# EAGLE board me433-2021 (EAGLE 9.6.2)

Size 100 x 80 mm. Coordinates in mm from the lower left corner, seen from the top.
Outline: 0,0 100,0 100,80 0,80 0,0
Copper layers (1*16): Top 0.035mm / dielectric 1.5mm / Bottom 0.035mm
Design rules "default": minimum track width 6mil, minimum drill 0.35mm, track to track 6mil, track to pad 6mil, pad to pad 6mil, via to via 6mil, smd to smd 6mil, copper to edge 40mil, drill to drill 6mil, minimum pad ring 10mil, minimum via ring 8mil, stop-mask expansion 4mil, vias tented up to drill 0mil, thermal gap 10mil

## Footprints (pad centres in the part's own frame; a part is rotated, then mirrored left to right if it is on the bottom)
1X02 = drill 1.016 pad 1.88: 1 0,0; 2 2.54,0
C025-030X050 = drill 0.813 octagon: 1 -1.27,0; 2 1.27,0
B45181B = drill 0.813: + -2.54,0 | drill 0.813 octagon: - 2.54,0
1X01 = drill 1.016 pad 1.88: 1 0,0
LED3MM = drill 0.813 octagon: A -1.27,0; K 1.27,0
0207/10 = drill 0.813 octagon: 1 -5.08,0; 2 5.08,0
PUSH = drill 1: P$1 -2.5,0; P$2 2.5,0
DIL28-3 = drill 0.813 long: 1 -16.51,-3.81; 2 -13.97,-3.81; 3 -11.43,-3.81; 4 -8.89,-3.81; 5 -6.35,-3.81; 6 -3.81,-3.81; 7 -1.27,-3.81; 8 1.27,-3.81; 9 3.81,-3.81; 10 6.35,-3.81; 11 8.89,-3.81; 12 11.43,-3.81; 13 13.97,-3.81; 14 16.51,-3.81; 15 16.51,3.81; 16 13.97,3.81; 17 11.43,3.81; 18 8.89,3.81; 19 6.35,3.81; 20 3.81,3.81; 21 1.27,3.81; 22 -1.27,3.81; 23 -3.81,3.81; 24 -6.35,3.81; 25 -8.89,3.81; 26 -11.43,3.81; 27 -13.97,3.81; 28 -16.51,3.81
MICROUSB = smd 0.4 x 1.35: 1.VBUS -1.3,2.7; 2 -0.65,2.7; 3 0,2.7; 4 0.65,2.7; 5.GND 1.3,2.7 | drill 1.25 pad 1.778: P$6 -2.5,2.7 | drill 1.25 pad 1.676: P$7 2.5,2.7 | drill 1.5: P$8 -3.5,0; P$9 3.5,0
POLOLU3V3 = drill 1.016 pad 1.88: 1 0,3.81; 2 0,1.27; 3 0,-1.27; 4 0,-3.81
SLIDE = drill 0.9: 1 -2.5,0; 2 0,0; 3 2.5,0
1X05 = drill 1.016 pad 1.88: 1 0,0; 2 2.54,0; 3 5.08,0; 4 7.62,0; 5 10.16,0
POLOLU_DRV8835_H_BRIDGE_BREAKOUT = drill 0.6 square: P$1 -3.81,7.62; P$2 -3.81,5.08; P$3 -3.81,2.54; P$4 -3.81,0; P$5 -3.81,-2.54; P$6 -3.81,-5.08; P$7 -3.81,-7.62; P$8 3.81,-7.62; P$9 3.81,-5.08; P$10 3.81,-2.54; P$11 3.81,0; P$12 3.81,2.54; P$13 3.81,5.08; P$14 3.81,7.62
1X06 = drill 1.016 pad 1.88: 1 0,0; 2 2.54,0; 3 5.08,0; 4 7.62,0; 5 10.16,0; 6 12.7,0
1X07 = drill 1.016 pad 1.88: 1 0,0; 2 2.54,0; 3 5.08,0; 4 7.62,0; 5 10.16,0; 6 12.7,0; 7 15.24,0
2X12 = drill 1.016 pad 1.88 octagon: 1 0,0; 2 0,2.54; 3 2.54,0; 4 2.54,2.54; 5 5.08,0; 6 5.08,2.54; 7 7.62,0; 8 7.62,2.54; 9 10.16,0; 10 10.16,2.54; 11 12.7,0; 12 12.7,2.54; 13 15.24,0; 14 15.24,2.54; 15 17.78,0; 16 17.78,2.54; 17 20.32,0; 18 20.32,2.54; 19 22.86,0; 20 22.86,2.54; 21 25.4,0; 22 25.4,2.54; 23 27.94,0; 24 27.94,2.54

## Placement (x,y rotation side)
BAT  [1X02]  2.54,-10.16 0 top  (outside the outline)
C1  0.1uF  [C025-030X050]  3.81,-64.77 0 top  (outside the outline)
C2  0.1uF  [C025-030X050]  3.81,-71.12 0 top  (outside the outline)
C3  10uF  [B45181B]  3.81,-77.47 0 top  (outside the outline)
C4  0.1uF  [C025-030X050]  3.81,-106.68 0 top  (outside the outline)
HREF  [1X01]  -25.4,-167.64 0 top  (outside the outline)
J1  B  [1X02]  -10.16,-146.05 0 top  (outside the outline)
J2  A  [1X02]  -10.16,-149.86 0 top  (outside the outline)
J3  [1X01]  -30.48,-167.64 0 top  (outside the outline)
J4  [1X01]  -35.56,-167.64 0 top  (outside the outline)
J5  [1X01]  -40.64,-167.64 0 top  (outside the outline)
J6  [1X01]  -45.72,-167.64 0 top  (outside the outline)
J7  [1X01]  -50.8,-167.64 0 top  (outside the outline)
J8  [1X01]  -55.88,-167.64 0 top  (outside the outline)
J9  [1X01]  -60.96,-167.64 0 top  (outside the outline)
J10  [1X01]  -66.04,-167.64 0 top  (outside the outline)
J11  [1X01]  -71.12,-167.64 0 top  (outside the outline)
J12  [1X01]  -76.2,-167.64 0 top  (outside the outline)
LED1  RED  [LED3MM]  2.54,-35.56 0 top  (outside the outline)
LED2  GREEN  [LED3MM]  2.54,-123.19 0 top  (outside the outline)
PWDN  [1X01]  -20.32,-167.64 0 top  (outside the outline)
R1  330  [0207/10]  6.35,-41.91 0 top  (outside the outline)
R2  10k  [0207/10]  6.35,-59.69 0 top  (outside the outline)
R3  10k  [0207/10]  6.35,-114.3 0 top  (outside the outline)
R4  10k  [0207/10]  6.35,-119.38 0 top  (outside the outline)
R5  330  [0207/10]  6.35,-129.54 0 top  (outside the outline)
R6  10k  [0207/10]  6.35,-134.62 0 top  (outside the outline)
R7  4.7k  [0207/10]  -5.08,-163.83 0 top  (outside the outline)
R8  4.7k  [0207/10]  -5.08,-168.91 0 top  (outside the outline)
RESET  PUSH  [PUSH]  3.81,-52.07 0 top  (outside the outline)
STR  [1X01]  -15.24,-167.64 0 top  (outside the outline)
U1  PIC32MX170F256B  [DIL28-3]  33.02,40.64 270 top
U$1  MICROUSBMICROUSB  [MICROUSB]  6.35,-5.08 0 top
U$2  POLOLU3V3  [POLOLU3V3]  12.7,-17.78 0 top  (outside the outline)
U$3  SLIDE  [SLIDE]  6.35,-27.94 0 top  (outside the outline)
U$4  SNAP  [1X05]  2.54,-45.72 0 top  (outside the outline)
U$5  POLOLUDRV8835_GOOD  [POLOLU_DRV8835_H_BRIDGE_BREAKOUT]  -6.35,-133.35 0 top  (outside the outline)
U$6  ADACP2014_GOOD  [1X06]  2.54,-82.55 0 top  (outside the outline)
U$7  STM7789_IPS_DISPLAY  [1X07]  2.54,-87.63 0 top  (outside the outline)
U$8  MPC23017_IO_EXPANDER  [DIL28-3]  19.05,-96.52 0 top  (outside the outline)
U$9  OV7670_FIFO_CAMERA  [2X12]  -10.16,-157.48 0 top  (outside the outline)
USER  PUSH  [PUSH]  3.81,-139.7 0 top  (outside the outline)

## Library data of the parts
BAT HREF J1-J12 LED1 LED2 PWDN RESET STR U1 U$1-U$9 USER = me433-2021
C1-C4 = me433-2021; SPICEPREFIX: C
R1-R8 = me433-2021; SPICEPREFIX: R

## Nets
+3V3: C2.1 C4.1 LED1.A R2.2 R3.2 R4.2 R6.2 R7.2 R8.2 U1.28 U$2.1 U$4.2 U$5.P$13 U$7.2 U$8.9 U$8.18 U$9.1 U$9.15 U$9.20
+5V: U$1.1.VBUS U$3.1
ADIR: U$5.P$9 U$8.22
APWM: U$5.P$10 U$8.23
B0-PGD-D4: U1.4 U$4.4 U$9.10
B1-PGC-D5: U1.5 U$4.5 U$9.9
B6: R7.1 U1.15 U$9.3
B7: R8.1 U1.16 U$9.4
B8: R3.1 U1.17 U$8.12
B9: R4.1 U1.18 U$8.13
B12: U1.23 U$7.6
B13: U1.24 U$6.2 U$7.4
B14: U1.25 U$7.3
B15: U1.26 U$6.3 U$7.5
BDIR: U$5.P$11 U$8.24
BPWM: U$5.P$12 U$8.25
D0: U1.2 U$9.14
D1: U1.3 U$9.13
D2: U1.9 U$9.12
D3: U1.10 U$9.11
D6: U1.6 U$9.8
D7: U1.7 U$9.7
GND: BAT.1 C1.2 C2.2 C3.- C4.2 R1.1 R5.1 RESET.P$1 U1.8 U1.19 U1.27 U$1.5.GND U$2.2 U$4.3 U$5.P$1 U$5.P$14 U$6.6 U$7.1 U$8.10 U$8.15 U$8.16 U$8.17 U$9.2 USER.P$1
MCLR: R2.1 RESET.P$2 U1.1 U$4.1
N$1: LED1.K R1.2
N$2: C1.1 U1.13
N$3: C3.+ U1.20
N$4: J1.2 U$5.P$3
N$5: J1.1 U$5.P$4
N$6: J2.2 U$5.P$5
N$7: LED2.A U$8.21
N$8: LED2.K R5.2
N$9: R6.1 U$8.1 USER.P$2
N$10: J2.1 U$5.P$6
N$11: STR.1 U$9.17
N$12: PWDN.1 U$9.16
N$13: HREF.1 U$9.6
N$14: J3.1 U$8.2
N$15: J4.1 U$8.3
N$16: J5.1 U$8.4
N$17: J6.1 U$8.5
N$18: J7.1 U$8.6
N$19: J8.1 U$8.7
N$20: J9.1 U$8.8
N$21: J10.1 U$8.28
N$22: J11.1 U$8.27
N$23: J12.1 U$8.26
RCK: U1.12 U$9.18
RRST: U1.21 U$9.22
V+: BAT.2 U$3.3
VIN: U$2.3 U$3.2 U$5.P$2
VSY: U1.11 U$9.5
WR: U1.14 U$9.19
WRST: U1.22 U$9.21

## Tracks (layer width: path | path; a pad name or v marks a point on that pad's centre or on a via)
+3V3  (18 unrouted)
+5V  (1 unrouted)
ADIR  (1 unrouted)
APWM  (1 unrouted)
B0-PGD-D4  (2 unrouted)
B1-PGC-D5  (2 unrouted)
B6  (2 unrouted)
B7  (2 unrouted)
B8  (2 unrouted)
B9  (2 unrouted)
B12  (1 unrouted)
B13  (2 unrouted)
B14  (1 unrouted)
B15  (2 unrouted)
BDIR  (1 unrouted)
BPWM  (1 unrouted)
D0  (1 unrouted)
D1  (1 unrouted)
D2  (1 unrouted)
D3  (1 unrouted)
D6  (1 unrouted)
D7  (1 unrouted)
GND  (23 unrouted)
MCLR  (3 unrouted)
N$1  (1 unrouted)
N$2  (1 unrouted)
N$3  (1 unrouted)
N$4  (1 unrouted)
N$5  (1 unrouted)
N$6  (1 unrouted)
N$7  (1 unrouted)
N$8  (1 unrouted)
N$9  (2 unrouted)
N$10  (1 unrouted)
N$11  (1 unrouted)
N$12  (1 unrouted)
N$13  (1 unrouted)
N$14  (1 unrouted)
N$15  (1 unrouted)
N$16  (1 unrouted)
N$17  (1 unrouted)
N$18  (1 unrouted)
N$19  (1 unrouted)
N$20  (1 unrouted)
N$21  (1 unrouted)
N$22  (1 unrouted)
N$23  (1 unrouted)
RCK  (1 unrouted)
RRST  (1 unrouted)
V+  (1 unrouted)
VIN  (2 unrouted)
VSY  (1 unrouted)
WR  (1 unrouted)
WRST  (1 unrouted)